# Altium PCB Arduino-Pro-Mini.PcbDoc
Units mil, origin at the board's own origin, x right, y up, seen from the top; angles counter-clockwise.
Board outline 700 x 1300 mil, 2 copper layers (Top, Bottom), stack 61.811 mil thick; 29 components, 33 nets, 108 pads, 29 vias.
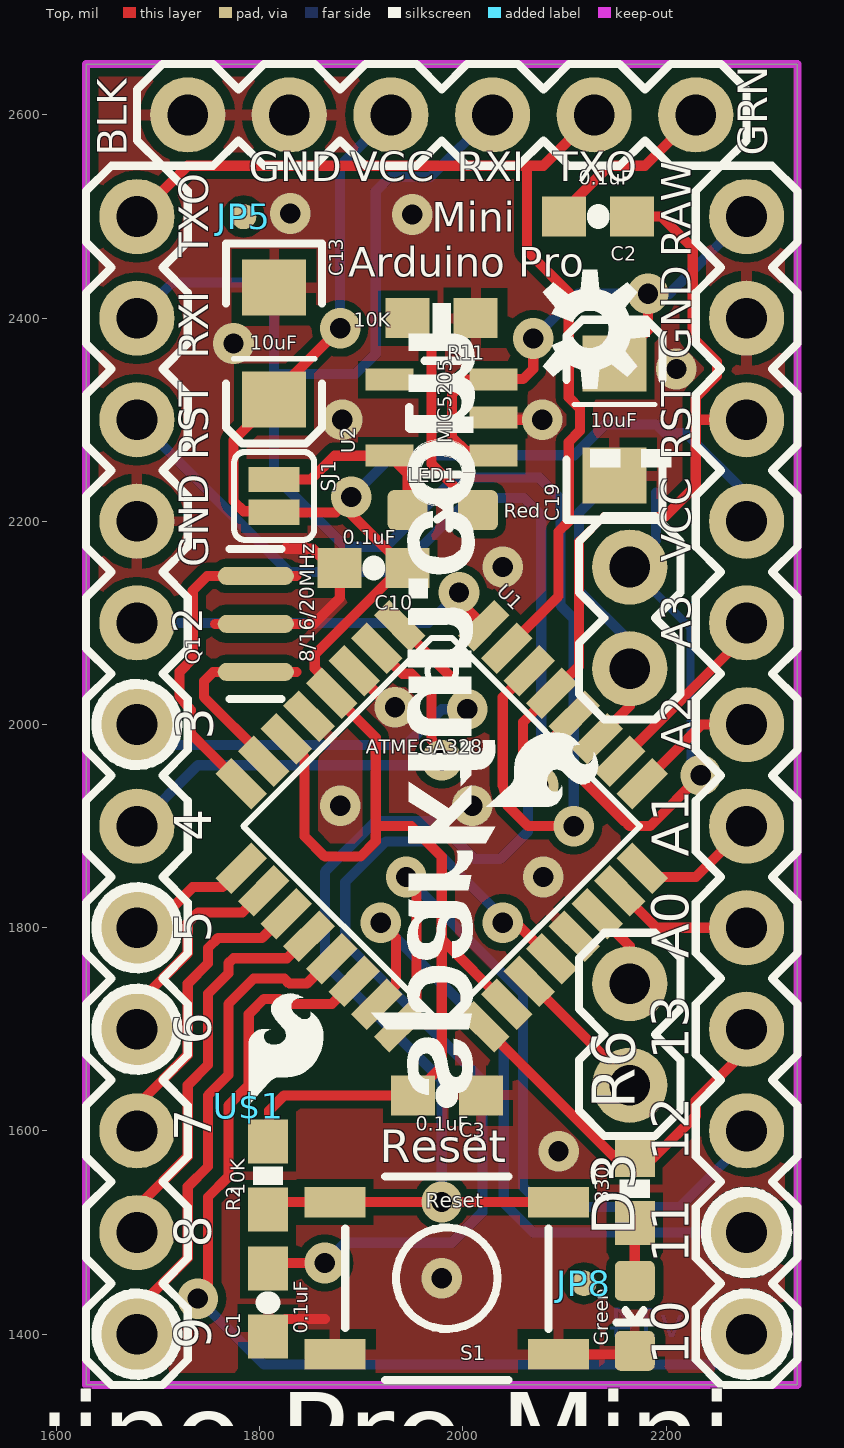
[diagram p0: Top view]
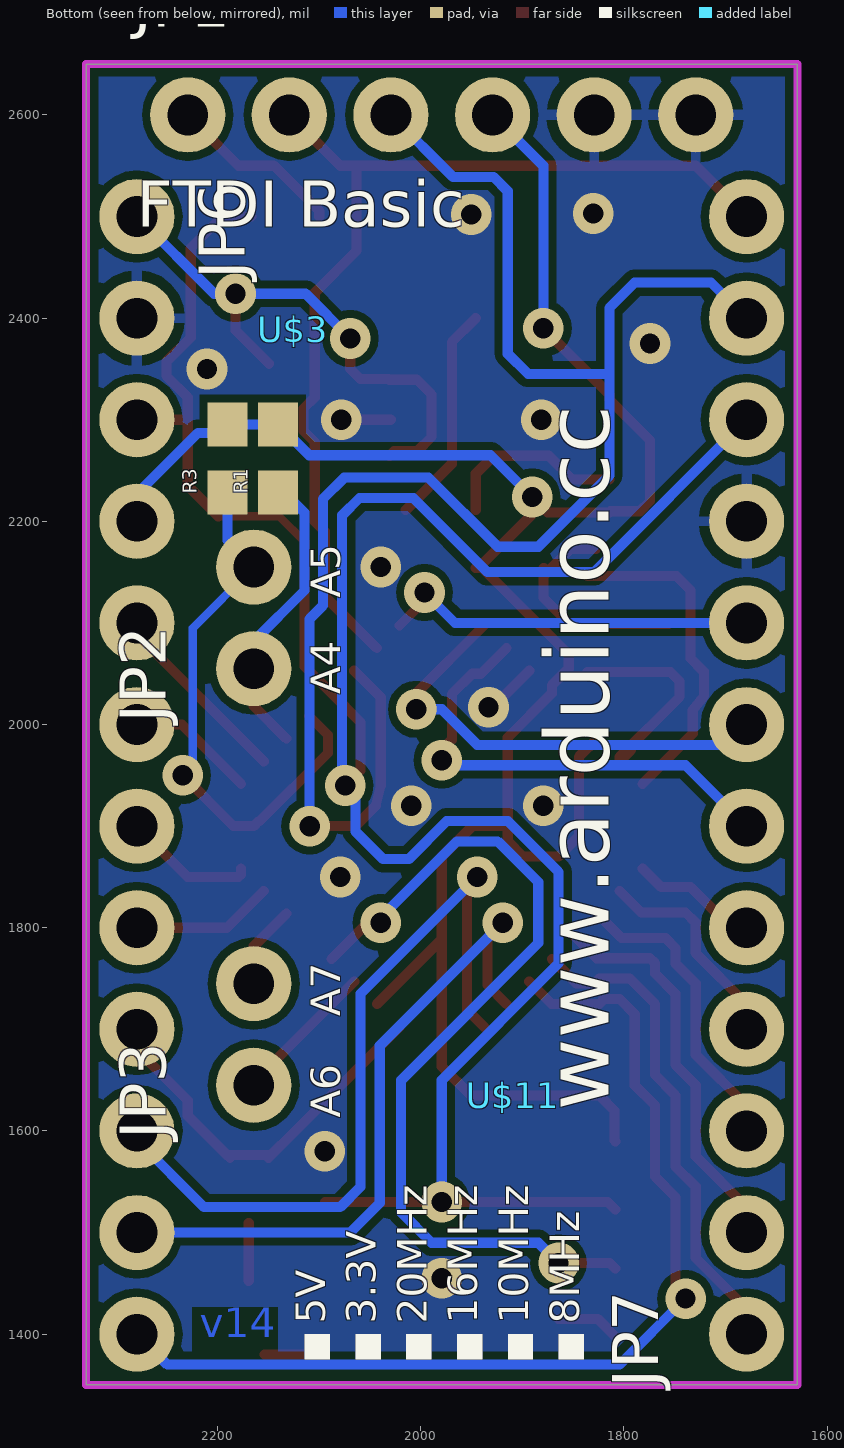
[diagram p1: Bottom view, seen from below]

## Layer stack, top to bottom
Top Solder: solder mask 0.4, Solder Resist, Dk 3.5
Top: signal copper 1.378
Dielectric 1: core 59.0551, FR-4, Dk 4.8
Bottom: signal copper 1.378
Bottom Solder: solder mask 0.4, Solder Resist, Dk 3.5

## Board outline
1629.22,2650 1629.22,1350 2329.22,1350 2329.22,2650

## Design rules (kind name [scope] priority, off if disabled: settings)
Clearance [All] p1: gap=8 except(0: SMDPad-SMDPad SMDPad-THPad SMDPad-Via)
Clearance "Clearance (Same Net)" [All] p2: gap=0 except(8: SMDPad-SMDPad SMDPad-THPad SMDPad-Via)
HoleSize HoleSize_1 [All] p1: absolutevalues=TRUE maxlimit=100000 minlimit=15 maxpercent=80.000 minpercent=20.000
HoleSize [All] p2: absolutevalues=TRUE maxlimit=100 minlimit=1 maxpercent=80.000 minpercent=20.000
HoleToHoleClearance mdViaViaSameLayer [All] p1: gap=8 allowstackedmicrovias=TRUE
HoleToHoleClearance [All] p2: gap=10 allowstackedmicrovias=TRUE
PasteMaskExpansion mlMinCreamFrame [All] p1: expansion=0
PasteMaskExpansion [All] p2: expansion=0
PolygonConnect ThermalVias [IsVia] p1: connectstyle=Direct reliefconductorwidth=10 reliefentries=4 polygonreliefangle="90 Angle" airgapwidth=10
PolygonConnect [All] p2: connectstyle=Relief reliefconductorwidth=10 reliefentries=4 polygonreliefangle="90 Angle" airgapwidth=10
RoutingVias [All] p1: holewidth=28 width=50 viastyle="Through Hole" minholewidth=28 minwidth=50 maxholewidth=28 maxwidth=50
SilkToSilkClearance [All] p1 off: silktosilkclearance=10
SilkToSolderMaskClearance [IsPad] p1 off: minsilkscreentomaskgap=10 clearancetoexposedcopper=TRUE
SolderMaskExpansion mlMinStopFrame [All] p1: expansion=4
SolderMaskExpansion [All] p2: expansion=4
Width Width_1 [All] p1: maxlimit=100000 minlimit=7 preferedwidth=10
Width [All] p2: maxlimit=10 minlimit=10 preferedwidth=10
25 further rules are at their usual default settings.

## Components (designator, comment, footprint, x,y, rotation, side; value= is the part's Value field where it differs from the comment)
C1 "0.1uF" 0603-CAP 1808.22,1431 r90 top
C2 "0.1uF" 0603-CAP 2133.22,2500 r180 top
C3 "0.1uF" 0603-CAP 1984.22,1635 r180 top
C10 "0.1uF" 0603-CAP 1912.22,2154 r180 top
C13 "10uF" EIA3216 1814.22,2375 r270 top
C19 "10uF" EIA3216 2149.22,2300 r90 top
D3 "Green" 0603-LED-ALT1 2169.22,1418 r180 top
FRAME1 "" CREATIVE_COMMONS 1000,1000 r0 top
JP1 "FTDI Basic" 1X06 2229.22,2600 r180 bottom
JP2 "" 1X02 2164.22,2055 r90 bottom
JP3 "" 1X02 2164.22,1645 r90 bottom
JP5 "" MICRO-FIDUCIAL 1784.22,2500 r0 top
JP6 "" 1X12 2279.22,2500 r270 bottom
JP7 "" 1X12 1679.22,1400 r90 bottom
JP8 "" MICRO-FIDUCIAL 2119.22,1450 r0 top
LED1 "Red" 0603-LED-ALT1 1980.22,2211 r270 top
Q1 "8/16/20MHz" RESONATOR-SMD-1:1 1796.22,2099 r90 top
R1 "" 0603-RES 2140.22,2262 r90 bottom
R2 "10K" 0603-RES 1808.22,1556 r90 top
R3 "" 0603-RES 2190.22,2262 r90 bottom
R6 "330" 0603-RES 2169.22,1543 r270 top
R11 "10K" 0603-RES 1979.22,2400 r180 top
S1 "Reset" TACTILE-SWITCH-SMD-ALT01 1984.22,1455 r180 top
SJ1 "" SJ_2S 1814.22,2225 r270 top
U1 "ATMEGA328" TQFP32-08 1979.22,1900 r315 top
U2 "MIC5205" SOT23-5 1979.22,2302 r90 top
U$1 "" SFE-LOGO-FLAME 1789.22,1625 r0 top
U$3 "" OSHW-LOGO-S 2125.22,2389 r90 bottom
U$11 "" SFE-NEW-WEBLOGO 1909.22,1635 r90 bottom

## Footprints (in the part's own frame and the unit in brackets; to place one, negate y for a bottom-side part, rotate by r counter-clockwise, add the part's x,y. Pads: shape width x height; smd on the part's side, far side on the other; paste and mask are expansions set on the pad)
1X02 [mil] "1X02"
  round 74 hole 40: 1(0,0) 2(100,0)
1X06 [mil] "1X06"
  round 74 hole 40: 1(0,0) 2(100,0) 3(200,0) 4(300,0) 5(400,0) 6(500,0)
1X12 [mil] "1X12"
  round 74 hole 40: 1(0,0) 2(100,0) 3(200,0) 4(300,0) 5(400,0) 6(500,0) 7(600,0) 8(700,0) 9(800,0) 10(900,0) 11(1000,0) 12(1100,0)
0603-CAP [mm] "0603-CAP"
  rect 1.1x1 smd: 1(-0.85,0) 2(0.85,0)
  silkscreen extent 0,-0.03 0,0.03
0603-LED-ALT1 [mm] "0603-LED-ALT1"
  rrect30% 1x1 smd: A(0,-0.877) C(0,0.877)
  silkscreen extent -0.46,-0.14 0.46,0.17
0603-RES [mm] "0603-RES"
  rect 1.1x1 smd: 1(-0.85,0) 2(0.85,0)
CREATIVE_COMMONS [mil] "CREATIVE_COMMONS"
EIA3216 [mil] "EIA3216"
  rect 55.12x62.99 smd: A(55.12,0) C(-55.12,0)
  silkscreen extent -98,-47 98,47
MICRO-FIDUCIAL [mil] "MICRO-FIDUCIAL"
  rrect100% 25x25 smd: 1(0,0)
OSHW-LOGO-S [mil] "OSHW-LOGO-S"
RESONATOR-SMD-1:1 [mil] "RESONATOR-SMD-1:1"
  rrect100% 17.72x75 smd: 1(-47.24,0) 2(0,0) 3(47.24,0)
  Top lines w10: -47.24,40 -47.24,0 -47.24,-40 ; 0,40 0,0 0,-40 ; 47.24,40 47.24,0 47.24,-40
  silkscreen extent -74,-25 74,26
SFE-LOGO-FLAME [mil] "SFE-LOGO-FLAME"
  silkscreen extent 0,0 74,110
SFE-NEW-WEBLOGO [mil] "SFE-NEW-WEBLOGO"
SJ_2S [mil] "SJ_2S"
  rect 25x50 smd: 1(-16.22,0) 2(16.22,0)
  silkscreen extent -43,-39 43,39
SOT23-5 [mil] "SOT23-5"
  rect 21.65x47.24 smd: 1(-37.4,-51.19) 2(0,-51.19) 3(37.4,-51.19) 4(37.4,51.19) 5(-37.4,51.19)
  silkscreen extent -56,-17 56,32
TACTILE-SWITCH-SMD-ALT01 [mil] "TACTILE-SWITCH-SMD-ALT01"
  rect 60x30 smd: 1(-110,75) 2(110,75) 3(-110,-75) 4(110,-75)
  silkscreen extent -100,-100 100,100
TQFP32-08 [mil] "TQFP32-08"
  rect 50x22 smd: 1(-169,110.24) 2(-169,78.74) 3(-169,47.24) 4(-169,15.75) 5(-169,-15.75) 6(-169,-47.24) 7(-169,-78.74) 8(-169,-110.24) 17(169,-110.24) 18(169,-78.74) 19(169,-47.24) 20(169,-15.75) 21(169,15.75) 22(169,47.24) 23(169,78.74) 24(169,110.24)
  rect 22x50 smd: 9(-110.24,-169) 10(-78.74,-169) 11(-47.24,-169) 12(-15.75,-169) 13(15.75,-169) 14(47.24,-169) 15(78.74,-169) 16(110.24,-169) 25(110.24,169) 26(78.74,169) 27(47.24,169) 28(15.75,169) 29(-15.75,169) 30(-47.24,169) 31(-78.74,169) 32(-110.24,169)
  silkscreen extent -138,-138 138,138

## Part data
C1 C2 C3 C10: library part 0603-CAP
C13 C19: library part EIA3216
D3 LED1: library part 0603-LED-ALT1
FRAME1: library part CREATIVE_COMMONS
JP1: library part 1X06
JP2 JP3: library part 1X02
JP5 JP8: library part MICRO-FIDUCIAL
JP6 JP7: library part 1X12
Q1: library part RESONATOR-SMD-1:1
R1 R2 R3 R6 R11: library part 0603-RES
S1: library part TACTILE-SWITCH-SMD-ALT01
SJ1: library part SJ_2S
U1: library part TQFP32-08
U2: library part SOT23-5
U$1: library part SFE-LOGO-FLAME
U$3: library part OSHW-LOGO-S
U$11: library part SFE-NEW-WEBLOGO

## Via types
v1: diameter 40/40 (per signal layer), hole 20, Top to Bottom, 29 vias

## Nets (pads, with @x,y where several pads share a name; then routed paths per layer and width w, separated by ;. In a path a pad name is that pad's centre, name@x,y a point inside that pad or via, vN(x,y) a via of type N, cw(c..) or ccw(c..) an arc to the next point about the centre after c; other vN are vias at no path point)
A0: JP6.8 U1.23 | length 139.8
  Top w10: U1.23 2190.57,1800 JP6.8
A1: JP6.7 U1.24 | length 130.2
  Top w10: U1.24@2176.67,1858.45 2176.67,1852.55 2179.22,1850 2229.22,1850 JP6.7
A2: JP6.6 U1.25 | length 126.8
  Top w10: U1.25@2176.67,1941.55 2235.12,2000 JP6.6
A3: JP6.5 U1.26 | length 199.2
  Top w10: U1.26 JP6.5@2279.22,2088.64 ; JP6.5@2279.22,2088.65 JP6.5 JP6.5@2279.22,2088.64
A4: JP2.1 R1.1 U1.27 | length 301.8
  Top w10: U1.27 2164.22,2018.19 JP2.1
  Bottom w10: R1.1 R1.1@2140.22,2234.41 ; R1.1@2142.22,2236.41 R1.1@2140.22,2234.41 ; JP2.1 2164.22,2082 2114.22,2132 2114.22,2208.41 R1.1@2140.22,2234.41
A5: JP2.2 R3.1 U1.28 | length 555.9
  Top w10: U1.28 2091.22,1989.73 2091.22,1972 2158.22,1905 2159.22,1905 2164.22,1900 2184.22,1900 v1(2234.22,1950)
  Bottom w8: JP2.2 2224.22,2095 2224.22,1960 v1(2234.22,1950)
  Bottom w10: JP2.2 2190.22,2181 R3.1
A6: JP3.1 U1.19 | length 143.1
  Top w10: U1.19 2164.22,1648.19 JP3.1
A7: JP3.2 U1.22 | length 82.2
  Top w10: U1.22 2164.22,1781.81 JP3.2
AREF: C1.2 U1.20 | length 898.4
  Top w10: C1.2 1813.76,1470 v1(1864.22,1470) ; U1.20 v1@2051.95,1805 ; v1@2051.94,1805 v1(2039.22,1805) v1@2051.95,1805
  Bottom w10: v1(1864.22,1470) 1884.22,1490 1989.22,1490 2019.22,1520 2019.22,1650 1884.22,1785 1884.22,1845 1924.22,1885 1964.22,1885 2039.22,1810 v1(2039.22,1805)
D2: JP7.8 U1.32 | length 372.1
  Top w10: v1(1996.22,2130) 1996.22,2122 U1.32@2020.77,2097.45
  Bottom w10: JP7.8 1966.22,2100 v1(1996.22,2130)
D3: JP7.7 U1.1 | length 473.7
  Top w10: U1.1@1937.67,2097.45 v1@2004.22,2030.9 ; v1@2004.22,2030.89 v1(2004.22,2015) v1@2004.22,2030.9
  Bottom w10: JP7.7 1699.22,1980 1944.22,1980 1979.22,2015 v1(2004.22,2015)
D4: JP7.6 U1.2 | length 482.7
  Top w10: U1.2 1940.57,2050 1949.22,2050 1969.22,2030 1969.22,1985 1989.22,1965 v1(1979.22,1965)
  Bottom w10: JP7.6 1739.22,1960 1974.22,1960 v1(1979.22,1965)
D5: JP7.5 U1.9 | length 126.8
  Top w10: JP7.5 1694.22,1800 1734.22,1840 1763.32,1840 U1.9@1781.77,1858.45
D6: JP7.4 U1.10 | length 224.8
  Top w10: JP7.4@1679.22,1711.35 JP7.4 1679.22,1725 1729.22,1775 1729.22,1805 1739.22,1815 1782.87,1815 U1.10
D7: JP7.3 U1.11 | length 300.1
  Top w10: JP7.3 1679.22,1625 1729.22,1675 1729.22,1745 1749.22,1765 1749.22,1780 1759.22,1790 1802.41,1790 U1.11
D8: JP7.2 U1.12 | length 392.7
  Top w10: JP7.2 1679.22,1525 1729.22,1575 1729.22,1645 1749.22,1665 1749.22,1735 1769.22,1755 1769.22,1765 1774.22,1770 1826.95,1770 U1.12
D9: JP7.1 U1.13 | length 486.4
  Top w10: JP7.1 1679.22,1425 1729.22,1475 1729.22,1545 1749.22,1565 1749.22,1635 1769.22,1655 1769.22,1725 1794.22,1750 1824.22,1750 1829.22,1745 1846.49,1745 U1.13@1870.85,1769.36
D10: JP6.12 U1.14 | length 1001.4
  Top w10: v1(1739.22,1435) 1749.22,1445 1749.22,1535 1769.22,1555 1769.22,1625 1789.22,1645 1789.22,1715 1804.22,1730 1819.22,1730 1824.22,1725 1871.04,1725 U1.14
  Bottom w10: v1(1739.22,1435) 1804.22,1370 2249.22,1370 JP6.12
DTR: C2.2 JP1.1 | length 174.1
  Top w10: C2.2 2099.76,2505.54 2144.22,2550 2179.22,2550 JP1.1
GND: C1.1 C3.1 C10.2 C13.C C19.C D3.C JP1.5 JP1.6 JP6.2 JP7.9 Q1.2 R11.1 S1.1 S1.2 U1.3 U1.5 U1.21 U2.2 | length 368.6
  Top w10: C1.1 1825.68,1415 1864.22,1415 ; 1826.22,2174 1827.22,2173 1852.22,2173 1879.22,2146 1879.22,2125 1853.22,2099 1836.22,2099 ; C10.2 C10.2@1879.22,2153.54 ; U1.3 1931.03,2015 v1@1934.22,2015 ; U2.2@2029.22,2300 v1(2078.22,2300) ; S1.1 D3.C@2153.75,1380
  other v1: 1979.22,1455 2094.22,1580 2079.22,1850 1879.22,1920 2009.22,1920 1933.22,2017 2039.22,2155 1881.22,2300 2210.22,2350 1774.22,2375 1950.22,2502 1830.22,2503
MISO: JP6.10 U1.16 | length 775.7
  Top w10: U1.16@1937.67,1702.55 1954.22,1719.1 1954.22,1840 v1(1944.22,1850)
  Bottom w10: v1(1944.22,1850) 2059.22,1735 2059.22,1545 2079.22,1525 2213.22,1525 2279.22,1591 JP6.10
MOSI: JP6.11 U1.15 | length 671.3
  Top w10: U1.15 1934.22,1743.65 1934.22,1790 v1(1919.22,1805)
  Bottom w10: v1(1919.22,1805) 2040.22,1684 2040.22,1529 2069.22,1500 JP6.11
N$1: Q1.3 U1.8 | length 248.1
  Top w10: 1756.22,2146.24 1748.46,2146.24 1734.22,2132 1734.22,2065 1721.22,2052 1721.22,2028 1732.22,2014 1732.22,1991.1 U1.8@1781.77,1941.55
N$2: Q1.1 U1.7 | length 133.6
  Top w10: 1756.22,2051.76 1754.22,2051.76 1745.22,2042.76 1745.22,2027 1804.04,1968.18 U1.7 ; U1.7@1793.09,1974.81 U1.7@1804.04,1963.86
N$3: LED1.A SJ1.1 U2.5 | length 184.4
  Top w10: SJ1.1 1850.44,2241.22 1873.82,2264.6 U2.5 1945.69,2246.94 LED1.A
N$4: LED1.C R11.2 | length 217.6
  Top w10: R11.2 1969.22,2376.54 1969.22,2256.53 LED1.C
N$7: D3.A R6.2 | length 57
  Top w10: D3.A R6.2
RAW: C19.A JP6.1 U2.1 U2.3 | length 553.4
  Top w10: U2.1 2026,2269 2003.22,2269 1989.22,2283 1989.22,2325 2003.62,2339.4 U2.3 2031,2340 2059.22,2340 2069.22,2350 v1(2069.22,2380) ; C19.A 2182.22,2388.12 v1(2182.22,2424)
  Bottom w10: v1(2069.22,2380) 2113.22,2424 v1(2182.22,2424) 2203.22,2424 JP6.1
RESET: C2.1 JP6.3 JP7.10 R2.1 S1.3 S1.4 U1.29 | length 2505
  Top w8: 2114.22,2180 2139.22,2205 2199.22,2205
  Top w10: R2.1 1815.68,1530 S1.4 v1(1979.22,1530) S1.3 ; v1(2074.22,1940) 2059.22,1955 2059.22,2002.27 U1.29 2114.22,2057.27 2114.22,2180 ; C2.1 2195.22,2500 2226.22,2469 2226.22,2381 2250.22,2357 2250.22,2343 2229.22,2322 2229.22,2300 ; 2199.22,2205 2229.22,2235 2229.22,2300 ; JP6.3 2229.22,2300
  Bottom w10: JP7.10 1829.22,2150 1934.22,2150 2007.22,2223 2060.22,2223 2077.22,2206 2077.22,1943 v1(2074.22,1940) 2064.22,1930 2064.22,1895 2036.72,1867.5 2011.72,1867.5 1974.22,1905 1914.22,1905 1864.22,1855 1864.22,1765 1979.22,1650 v1(1979.22,1530)
RXI: JP1.3 JP7.11 U1.30 | length 1632.1
  Top w10: U1.30 2039.22,2026.82 2039.22,1940 2044.22,1920 2064.22,1900 v1(2109.22,1900)
  Bottom w10: JP7.11 1714.22,2435 1789.22,2435 1814.22,2410 1814.22,2345 ; JP1.3 1968.22,2539 1928.22,2539 1914.22,2525 1914.22,2365 1894.22,2345 1814.22,2345 ; v1(2109.22,1900) 2109.22,2104 2096.22,2117 2096.22,2222 2075.22,2243 1992.22,2243 1924.22,2175 1884.22,2175 1814.22,2245 1814.22,2345
SCK: JP6.9 R6.1 U1.17 | length 390.8
  Top w10: U1.17@2020.77,1702.55 2126.27,1597.05 2146.86,1576.46 ; R6.1@2149.86,1573.46 2146.86,1576.46 ; R6.1@2187.68,1573.46 2190.68,1576.46 ; JP6.9 2279.22,1680 2229.22,1630 2229.22,1615 2190.68,1576.46 ; 2146.86,1576.46 R6.1 2190.68,1576.46
TXO: JP1.2 JP7.12 U1.31 | length 1017.7
  Top w10: JP7.12 1729.22,2550 2063.22,2550 ; U1.31 2094.22,2126.35 2094.22,2190 2104.22,2200 2104.22,2278 2115.22,2289 2115.22,2311 2104.22,2322 2104.22,2425 2063.22,2466 2063.22,2550 ; JP1.2 2079.22,2550 2064.22,2550 2063.22,2550
VCC: C3.2 C10.1 C13.A JP1.4 JP6.4 R1.2 R2.2 R3.2 SJ1.2 U1.4 U1.6 U1.18 | length 2262.4
  Top w10: R2.2 1809.22,1590.46 1809.22,1620 1824.22,1635 C3.2 1979.22,1663.46 1979.22,1785 ; U1.6 1844.22,1968.19 1844.22,1890 1864.22,1870 1899.22,1870 1914.22,1885 1914.22,1900 ; U1.4@1870.85,2031.63 U1.4@1870.85,2030.64 ; v1(1879.22,2390) 1814.22,2325 C13.A 1774.22,2279.88 1774.22,2220 1784.22,2210 1813,2210 SJ1.2 1875,2208.78 v1(1890.22,2224) 1890.22,2207 1943.22,2154 C10.1 1939.22,2154 1854.22,2069 1854.22,2055.27 1870.85,2038.63 U1.4@1870.85,2030.64 ; U1.18 1979.22,1788.64 ; U1.4@1870.85,2030.64 1914.22,1987.27 1914.22,1900 ; 1914.22,1900 1949.22,1900 1979.22,1870 1979.22,1788.64 ; 1979.22,1785 1981.04,1786.82 1979.22,1788.64 ; 1979.22,1785 1979.22,1788.64
  Bottom w10: v1(1879.22,2390) 1879.22,2550 JP1.4 ; v1(1890.22,2224) 1931.22,2265 2109.76,2265 R1.2 R3.2 2198.68,2287 2219.22,2287 2279.22,2227 JP6.4
pads on no net: JP5.1 JP8.1 U2.4

## Polygon pours and split planes (outlines as drawn)
GND on Top "Top-GND" (solid, remove dead copper, pour order 0): 1624.22,2655 2334.22,2655 2334.22,1345 1624.22,1345
GND on Bottom "Bottom-GND" (solid, remove dead copper, pour order 2): 1624.22,2655 2334.22,2655 2334.22,1345 1624.22,1345

## Keep-outs
Keep-Out Layer:
  the board outline again, w8

## Other copper
Bottom:
  text "v14" at 2217.22,1387 h49.6

## Silkscreen, mask and mechanical layers (free items; w line width, h text height)
Top Overlay:
  circle w10: c1679.22,1700 r40
  circle w10: c1679.22,1800 r40
  circle w10: c1679.22,2000 r40
  circle w10: c1679.22,1400 r40
  circle w10: c2279.22,1400 r40
  circle w10: c2279.22,1500 r40
  text "BLK" at 1679.22,2560 h49.6 r90
  text "GRN" at 2309.22,2560 h49.6 r90
  text "GND" at 1789.22,2525 h49.6
  text "VCC" at 1889.22,2525 h49.6
  text "RXI" at 1994.22,2525 h49.6
  text "TXO" at 2089.22,2525 h49.6
  text "Mini" at 1969.22,2475 h49.6
  text "TXO" at 1759.22,2460 h49.6 r90
  text "RAW" at 2234.22,2460 h49.6 r90
  text "Arduino Pro" at 1887.22,2431 h49.6
  text "Valid combinations:" at 2409.22,2380 h77.5
  text "RXI" at 1759.22,2360 h49.6 r90
  text "GND" at 2234.22,2360 h49.6 r90
  text "168V / 3.3V Reg / 8MHz" at 2409.22,2280 h77.5
  text "RST" at 1759.22,2260 h49.6 r90
  text "RST" at 2234.22,2260 h49.6 r90
  text "168 / 5V Reg / 16MHz" at 2409.22,2180 h77.5
  text "VCC" at 2234.22,2160 h49.6 r90
  text "GND" at 1759.22,2155 h49.6 r90
  text "2" at 1753.22,2090 h49.6 r90
  text "168 / 5V Reg / 20MHz" at 2409.22,2080 h77.5
  text "A3" at 2234.22,2075 h49.6 r90
  text "3" at 1766.22,1985 h62 r90
  text "Mark back accordingly" at 2409.22,1980 h77.5
  text "A2" at 2234.22,1975 h49.6 r90
  text "4" at 1764.22,1885 h62 r90
  text "A1" at 2234.22,1870 h62 r90
  text "5" at 1764.22,1785 h62 r90
  text "A0" at 2234.22,1770 h62 r90
  text "6" at 1764.22,1685 h62 r90
  text "13" at 2234.22,1670 h62 r90
  text "7" at 1764.22,1590 h62 r90
  text "12" at 2234.22,1570 h62 r90
  text "Reset" at 1918.22,1569 h32
  text "8" at 1764.22,1485 h62 r90
  text "11" at 2234.22,1470 h62 r90
  text "9" at 1764.22,1385 h62 r90
  text "10" at 2234.22,1370 h62 r90
  text "Arduino Pro Mini" at 1349.22,1235 h139.5
Bottom Overlay:
  rectangle: 2039.22,1375 2064.22,1400
  rectangle: 2089.22,1375 2114.22,1400
  rectangle: 1989.22,1375 2014.22,1400
  rectangle: 1939.22,1375 1964.22,1400
  rectangle: 1889.22,1375 1914.22,1400
  rectangle: 1839.22,1375 1864.22,1400
  text "A5" at 2069.22,2125 h49.6 r270
  text "A4" at 2069.22,2030 h49.6 r270
  text "A7" at 2069.22,1713 h49.6 r270
  text "www.arduino.cc" at 1794.22,1620 h108.5 r270
  text "A6" at 2069.22,1613 h49.6 r270
  text "8MHz" at 1834.22,1410 h49.6 r270
  text "10MHz" at 1884.22,1410 h49.6 r270
  text "16MHz" at 1934.22,1410 h49.6 r270
  text "20MHz" at 1984.22,1410 h49.6 r270
  text "3.3V" at 2034.22,1410 h49.6 r270
  text "5V" at 2084.22,1410 h49.6 r270
Dimension:
  the board outline again, w8
tDocu:
  lines w3: 1764.22,1370 1764.22,2500 ; 2239.22,1370 2239.22,2500
  text "Original Arduino Mini Design by Team Arduino" at 2229.22,1078.98 h59.5
  text "Arduino Pro Mini Design by SparkFun Electronics" at 2229.22,1019.48 h59.5
  text "Revised by Pete Lewis" at 2229.22,959.98 h59.5

## Text inside footprints (layer, text, board x,y; h text height)
FRAME1: tDocu "Released under the Creative Commons Attribution Share-Alike 3.0 License" at 200,1200 h108.5; tDocu "http://creativecommons.org/licenses/by-sa/3.0" at 1000,1100 h108.5; tDocu "Designed by:" at 1450,1000 h108.5